# Altium PCB EvaluationV1.0.PcbDoc
Units mm, origin at the board's own origin, x right, y up, seen from the top; angles counter-clockwise.
Board outline 70 x 56 mm, 2 copper layers (Top Layer, Bottom Layer), stack 1.672 mm thick; 57 components, 53 nets, 270 pads, 78 vias.
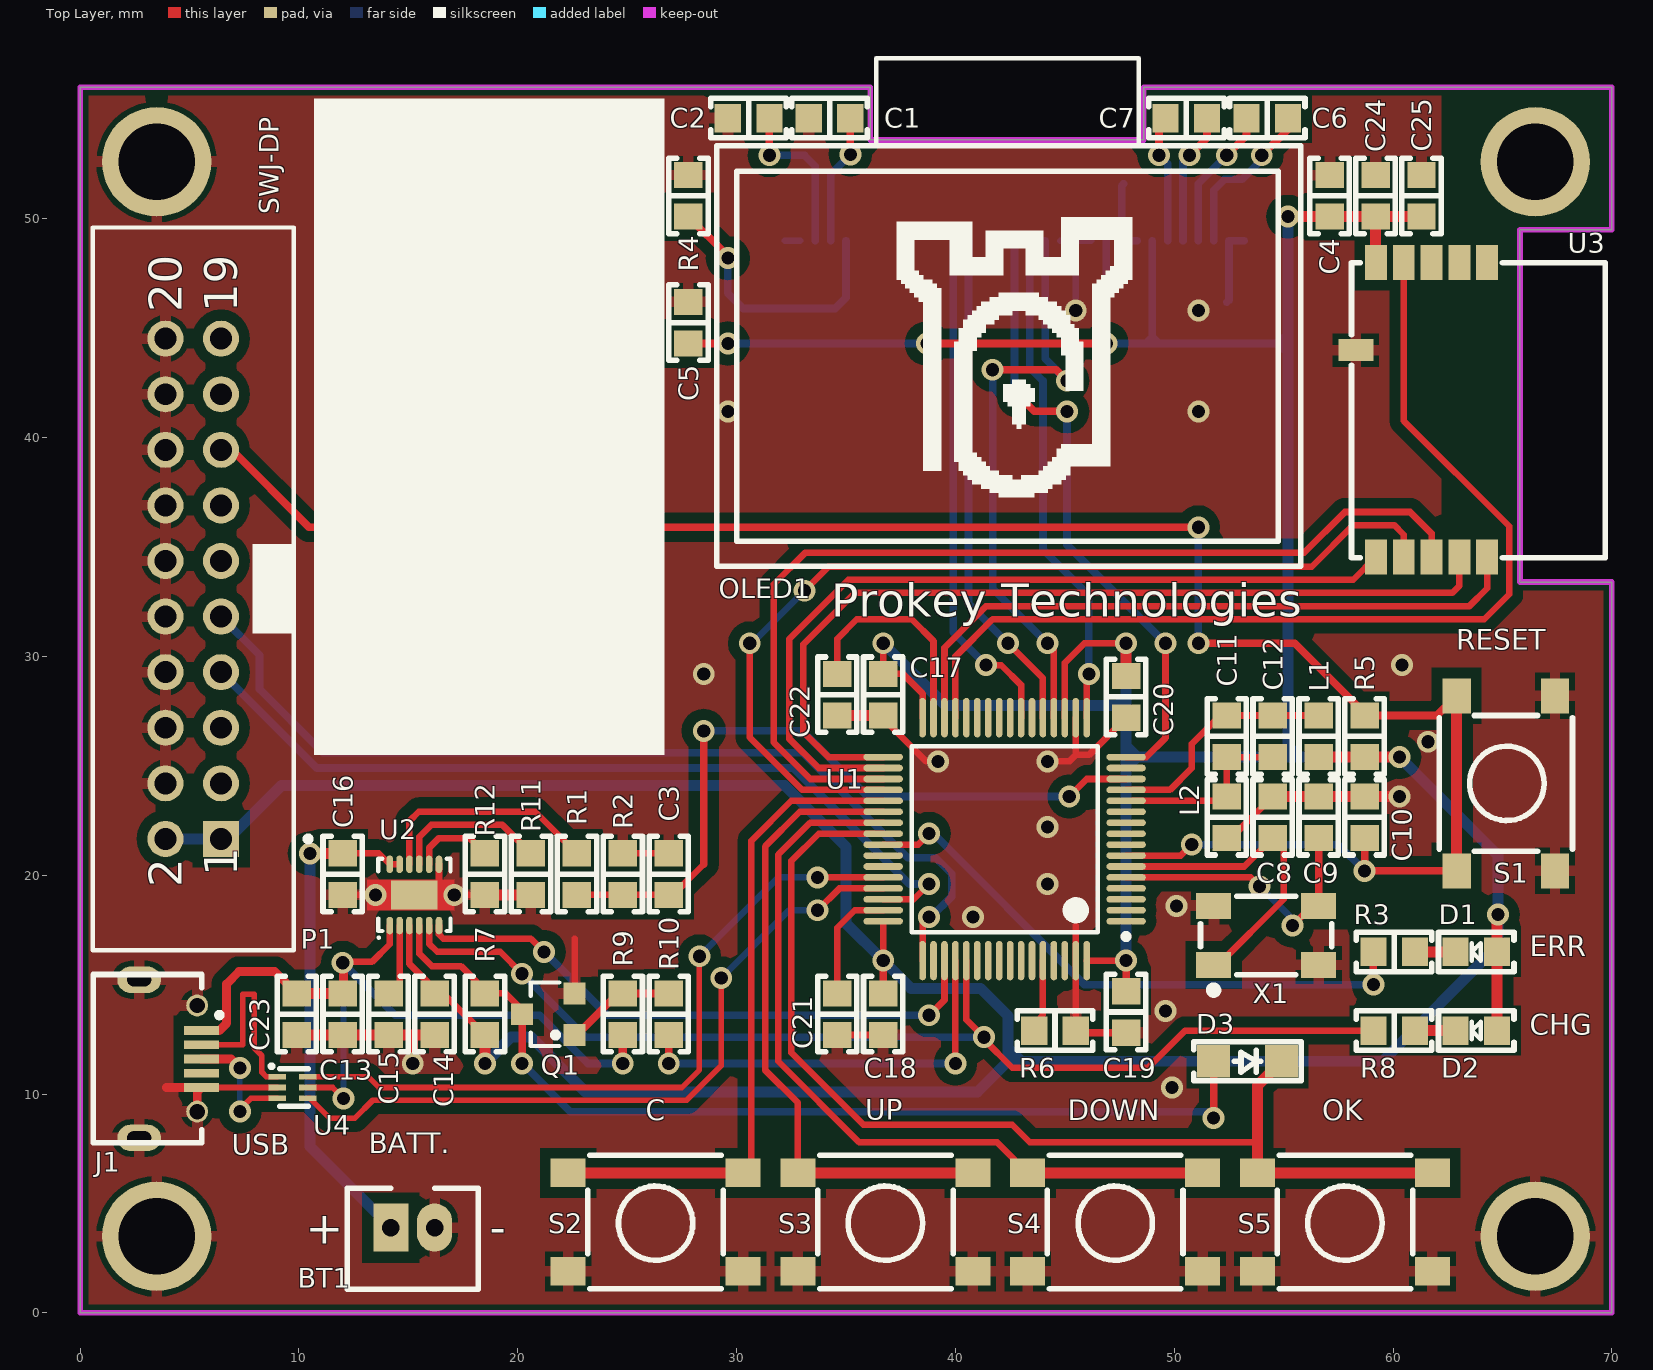
[diagram p0: Top Layer view]
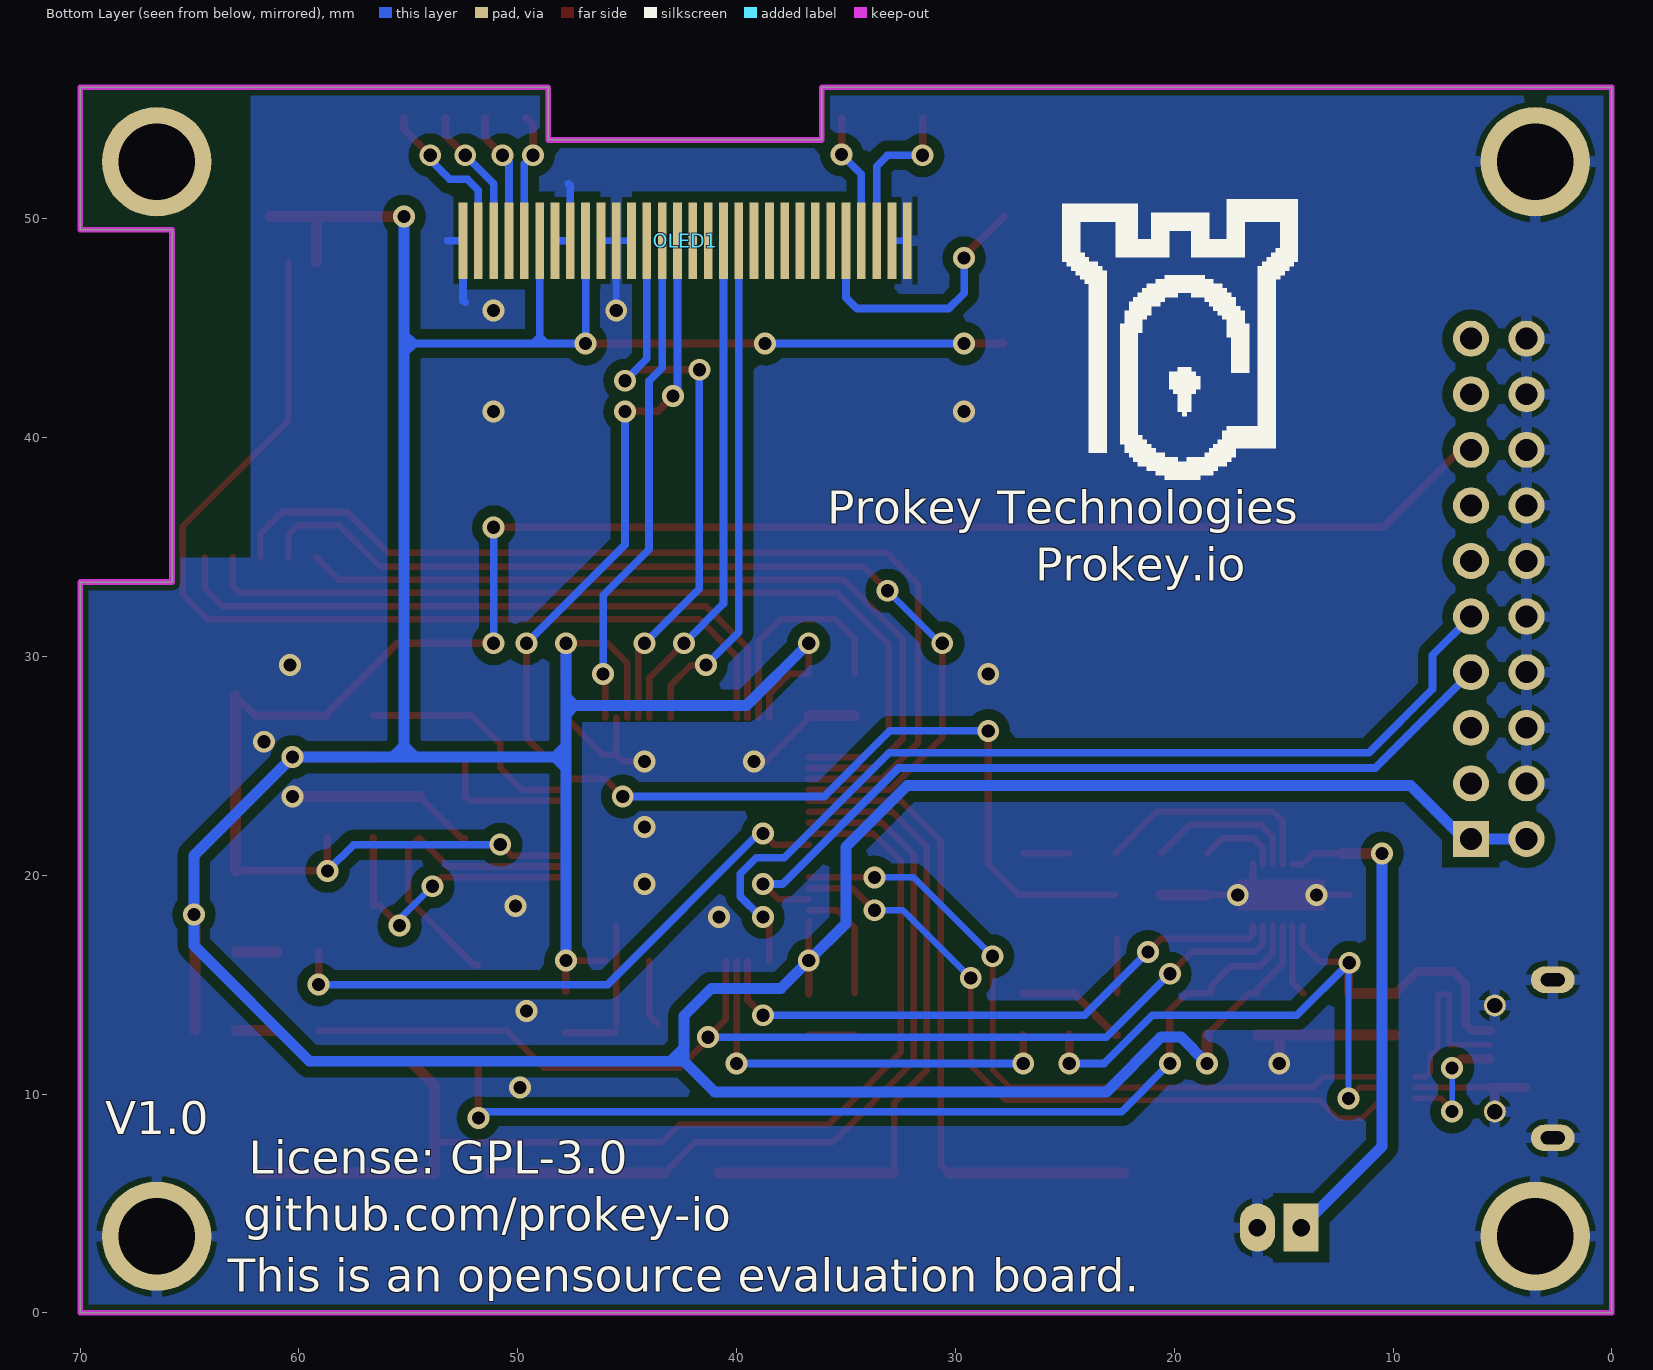
[diagram p1: Bottom Layer view, seen from below]
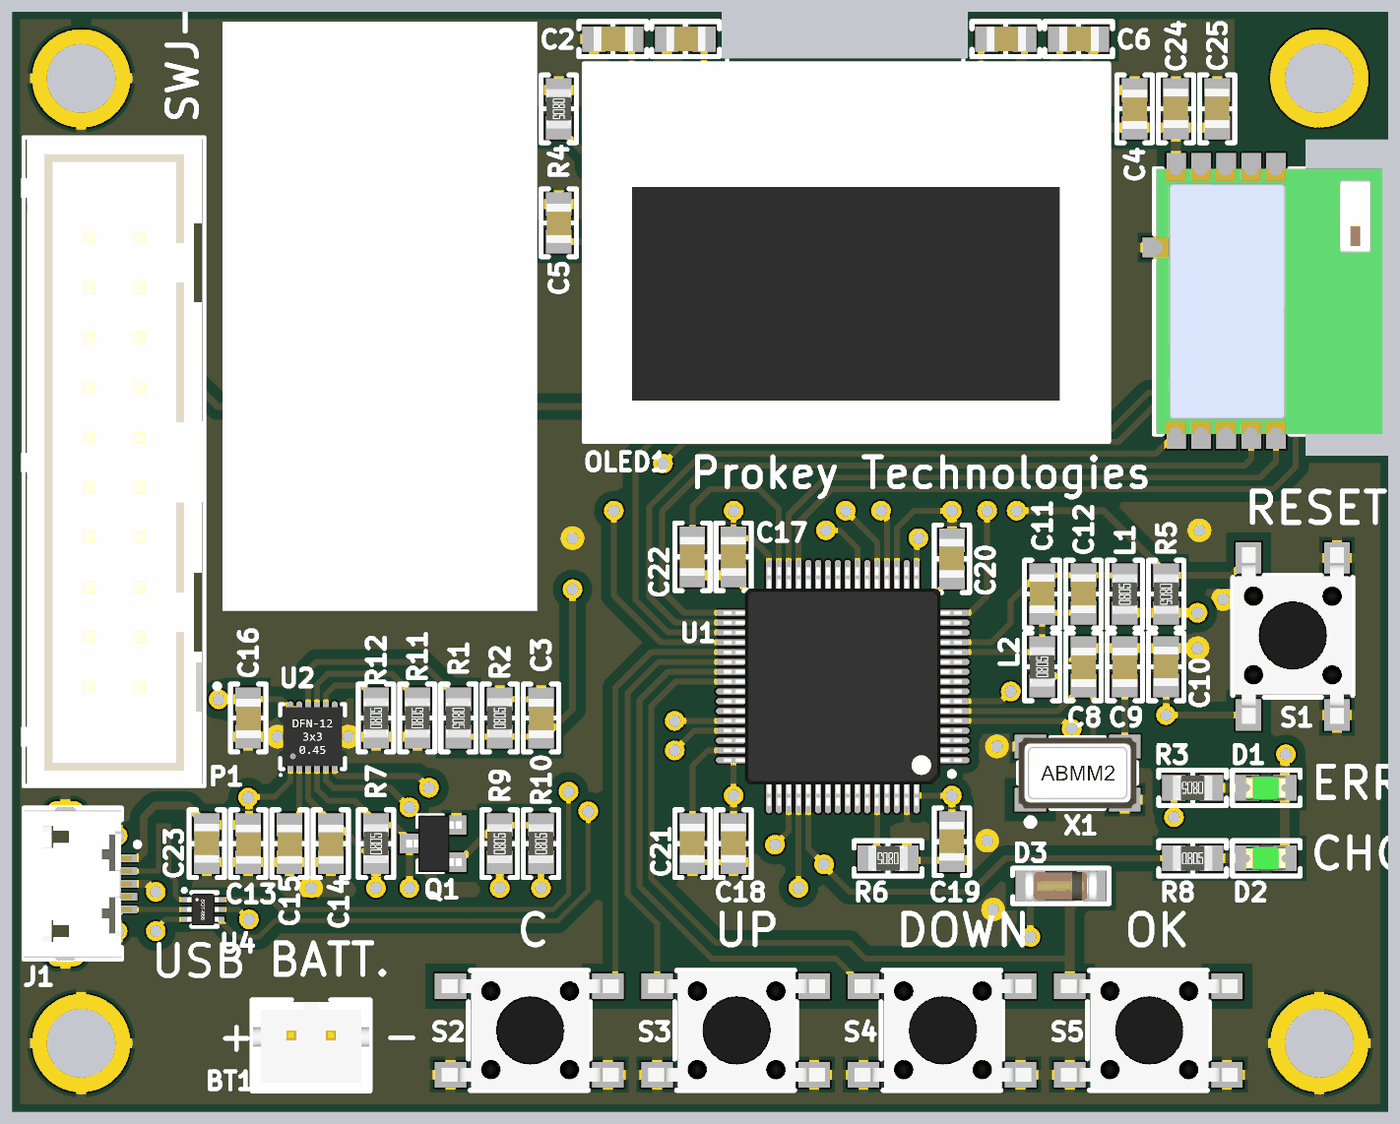
[diagram p2: 3D render of the assembled board from above, using the file's embedded part models]

## Layer stack, top to bottom
Top Solder: solder mask 0.0254, SM-003, Dk 4
Top Layer: signal copper 0.036
Dielectric 1: dielectric 1.6, FR-4, Dk 4.8
Bottom Layer: signal copper 0.036
Bottom Solder: solder mask 0.0254, SM-003, Dk 4

## Board outline
0,0 0,56 36.1,56 36.1,53.6 48.6,53.6 48.6,56 70,56 70,49.5 65.8,49.5 65.8,33.4 70,33.4 70,0

## Design rules (kind name [scope] priority, off if disabled: settings)
Clearance Clearance_1 [InPolygon vs IsKeepOut] p1: gap=0.254 ignorepadtopadclearanceinfootprint=FALSE
Clearance [All] p2: gap=0.254 ignorepadtopadclearanceinfootprint=FALSE except(0: Arc-Hole Track-Hole SMDPad-Hole THPad-Hole Via-Hole Fill-Hole Poly-Hole Region-Hole Text-Hole; 0.15: Track-Track Track-SMDPad SMDPad-SMDPad; 0.2: Arc-Arc Arc-Track Arc-SMDPad; 0.5: Arc-Poly Track-Poly SMDPad-Poly THPad-Poly Via-Poly Fill-Poly Poly-Poly)
HoleSize [All] p1: absolutevalues=TRUE maxlimit=5 minlimit=0.6 maxpercent=80.000 minpercent=20.000
MinimumSolderMaskSliver [All] p1: minsoldermaskwidth=0.2
PolygonConnect PolygonConnect_1 [IsVia] p1: connectstyle=Direct reliefconductorwidth=0.254 reliefentries=4 polygonreliefangle="90 Angle" airgapwidth=0.254
PolygonConnect [All] p2: connectstyle=Relief reliefconductorwidth=0.5 reliefentries=4 polygonreliefangle="90 Angle" airgapwidth=0.254
RoutingVias [All] p1: holewidth=0.6 width=1 viastyle="Through Hole" minholewidth=0.4 minwidth=0.8 maxholewidth=1.2 maxwidth=1.6
SolderMaskExpansion [All] p1: expansion=0.102 istentingtop=FALSE
Width [All] p1: maxlimit=10 minlimit=0.254 preferedwidth=0.254
28 further rules are at their usual default settings.

## Classes and differential pairs
component class EvaluationV1.0: BT1 C1 C2 C4 C6 C8 C9 C10 C12 C14 C16 C19 C21 C24 D1 D3 J1 L1 L2 OLED1 P1 Q1 R2 R4 R6 R7 R9 R10 S1 S2 S3 S5 U1 U2 U3 X1

## Components (designator, comment, footprint, x,y, rotation, side; value= is the part's Value field where it differs from the comment)
BT1 "BATT." "PH B2B" 14.2,3.9 r180 top
C1 "4u7" "CAP 0805" 34.25,54.6 r0 top
C2 "2u2" "CAP 0805" 30.55,54.6 r0 top
C3 "100nF" "CAP 0805" 26.9,20.05 r270 top
C4 "1uF" "CAP 0805" 57.1,51.05 r270 top
C5 "1uF" "CAP 0805" 27.8,45.25 r270 top
C6 "1uF" "CAP 0805" 54.25,54.6 r0 top
C7 "1uF" "CAP 0805" 50.55,54.6 r0 top
C8 "15pF" "CAP 0805" 54.5,22.65 r270 top
C9 "15pF" "CAP 0805" 56.6,22.65 r270 top
C10 "1uF" "CAP 0805" 58.7,22.65 r90 top
C11 "10nF" "CAP 0805" 52.4,26.35 r90 top
C12 "1uF" "CAP 0805" 54.5,26.35 r90 top
C13 "4u7" "CAP 0805" 12,13.65 r270 top
C14 "2u2" "CAP 0805" 16.2,13.65 r270 top
C15 "2u2" "CAP 0805" 14.1,13.65 r270 top
C16 "4u7" "CAP 0805" 12,20.05 r270 top
C17 "100nF" "CAP 0805" 36.7,28.25 r90 top
C18 "100nF" "CAP 0805" 36.7,13.65 r90 top
C19 "100nF" "CAP 0805" 47.8,13.75 r90 top
C20 "100nF" "CAP 0805" 47.8,28.15 r90 top
C21 "2u2" "CAP 0805" 34.6,13.65 r90 top
C22 "2u2" "CAP 0805" 34.6,28.25 r90 top
C23 "100nF" "CAP 0805" 9.9,13.65 r90 top
C24 "2u2" "CAP 0805" 59.2,51.05 r90 top
C25 "100nF" "CAP 0805" 61.3,51.05 r90 top
D1 "ERR" "LED 0805" 63.8,16.5 r180 top
D2 "CHG" "LED 0805" 63.8,12.9 r180 top
D3 "1N4148" "DIODE SOD-80" 51.8,11.5 r0 top
J1 "USB" USB_MICRO 5.55,12.9 r0 top
L1 "10uH" "RES 0805" 56.6,26.35 r90 top
L2 "10uH" "RES 0805" 52.4,22.65 r90 top
OLED1 "OLED_0.96Inch" "OLED 0.96\"" 52.5,49 r0 top locked
P1 "SWJ-DP" "BOX 2X10" 6.44,21.66 r90 top
Q1 "PT2222" SOT23 22.6,12.7 r90 top
R1 "4K7" "RES 0805" 22.7,20.05 r270 top
R2 "10K" "RES 0805" 24.8,20.05 r90 top
R3 "330R" "RES 0805" 60.05,16.5 r180 top
R4 "910K" "RES 0805" 27.8,51.05 r270 top
R5 "10K" "RES 0805" 58.7,26.35 r270 top
R6 "10K" "RES 0805" 44.55,12.9 r180 top
R7 "10K" "RES 0805" 18.5,13.65 r90 top
R8 "330R" "RES 0805" 60.05,12.9 r0 top
R9 "10K" "RES 0805" 24.8,13.65 r90 top
R10 "4K7" "RES 0805" 26.9,13.65 r90 top
R11 "4K7" "RES 0805" 20.6,20.05 r90 top
R12 "10K" "RES 0805" 18.5,20.05 r90 top
S1 "RESET" "SW SMD 6x6x5" 62.9,20.2 r90 top
S2 "C" "SW SMD 6x6x5" 22.3,6.4 r0 top
S3 "UP" "SW SMD 6x6x5" 32.8,6.4 r0 top
S4 "DOWN" "SW SMD 6x6x5" 43.3,6.4 r0 top
S5 "OK" "SW SMD 6x6x5" 53.8,6.4 r0 top
U1 "STM32F205RET6" LQFP64_N 42.25,21.65 r90 top
U2 "STNS01" DFN12-3x3 14.15,17.7 r90 top
U3 "SPBTLE-RF" SPBTLE-RF 64.3,48 r270 top
U4 "USBLC6" SOT-666 9,10.8 r0 top
X1 "8MHz" ABMM2 51.8,15.9 r0 top

## Footprints (in the part's own frame and the unit in brackets; to place one, negate y for a bottom-side part, rotate by r counter-clockwise, add the part's x,y. Pads: shape width x height; smd on the part's side, far side on the other; paste and mask are expansions set on the pad)
ABMM2 [mm]
  rect 1.6x1.2 smd paste+0 mask+0.102: 1(0,0) 2(4.8,0) 3(4.8,2.7) 4(0,2.7)
  silkscreen extent -0.6,-1.25 5.4,3.15, body extent -0.6,-0.45 5.4,3.15, height 1.21
"BOX 2X10" [mm]
  rect 1.65x1.65 hole 1: 1(0,0)
  round 1.65 hole 1: 2(0,2.54) 3(2.54,0) 4(2.54,2.54) 5(5.08,0) 6(5.08,2.54) 7(7.62,0) 8(7.62,2.54) 9(10.16,0) 10(10.16,2.54) 11(12.7,0) 12(12.7,2.54) 13(15.24,0) 14(15.24,2.54) 15(17.78,0) 16(17.78,2.54) 17(20.32,0) 18(20.32,2.54) 19(22.86,0) 20(22.86,2.54)
  silkscreen extent -5.08,-4.11 27.94,5.87, body extent -5.11,-3.2 27.91,6, height 9.46
"CAP 0805" [mm]
  rect 1.2x1.3 smd: 1(-0.95,0) 2(0.95,0)
  silkscreen extent -1.72,-0.9 1.73,0.9, body extent -0.97,-0.63 1.02,0.65, height 1.26
DFN12-3x3 [mm]
  oval 0.8x0.3 smd: 1(0,0) 2(0,-0.45) 3(0,-0.9) 4(0,-1.35) 5(0,-1.8) 6(0,-2.25) 7(2.8,-2.25) 8(2.8,-1.8) 9(2.8,-1.35) 10(2.8,-0.9) 11(2.8,-0.45) 12(2.8,0)
  rect 1.31x2.12 smd paste-0.82: 13(1.4,-1.125)
  silkscreen extent -0.6,-2.78 3.05,0.55, body extent -0.1,-2.63 2.9,0.38, height 0.76
"DIODE SOD-80" [mm]
  rect 1.5x1.5 smd: 1(0,0) 2(3.1,0)
  silkscreen extent -0.9,-0.9 4,0.9, body extent -0.29,-0.81 3.41,0.79, height 1.6
"LED 0805" [mm]
  rect 1.2x1.3 smd: 1(-0.95,0) 2(0.95,0)
  silkscreen extent -1.72,-0.9 1.73,0.9, body extent -0.99,-0.62 1.03,0.62, height 1.1
LQFP64_N [mm]
  oval 0.3x1.8 smd: 1(-3.75,-5.55) 2(-3.25,-5.55) 3(-2.75,-5.55) 4(-2.25,-5.55) 5(-1.75,-5.55) 6(-1.25,-5.55) 7(-0.75,-5.55) 8(-0.25,-5.55) 9(0.25,-5.55) 10(0.75,-5.55) 11(1.25,-5.55) 12(1.75,-5.55) 13(2.25,-5.55) 14(2.75,-5.55) 15(3.25,-5.55) 16(3.75,-5.55) 33(3.75,5.55) 34(3.25,5.55) 35(2.75,5.55) 36(2.25,5.55) 37(1.75,5.55) 38(1.25,5.55) 39(0.75,5.55) 40(0.25,5.55) 41(-0.25,5.55) 42(-0.75,5.55) 43(-1.25,5.55) 44(-1.75,5.55) 45(-2.25,5.55) 46(-2.75,5.55) 47(-3.25,5.55) 48(-3.75,5.55)
  oval 1.8x0.3 smd: 17(5.55,-3.75) 18(5.55,-3.25) 19(5.55,-2.75) 20(5.55,-2.25) 21(5.55,-1.75) 22(5.55,-1.25) 23(5.55,-0.75) 24(5.55,-0.25) 25(5.55,0.25) 26(5.55,0.75) 27(5.55,1.25) 28(5.55,1.75) 29(5.55,2.25) 30(5.55,2.75) 31(5.55,3.25) 32(5.55,3.75) 49(-5.55,3.75) 50(-5.55,3.25) 51(-5.55,2.75) 52(-5.55,2.25) 53(-5.55,1.75) 54(-5.55,1.25) 55(-5.55,0.75) 56(-5.55,0.25) 57(-5.55,-0.25) 58(-5.55,-0.75) 59(-5.55,-1.25) 60(-5.55,-1.75) 61(-5.55,-2.25) 62(-5.55,-2.75) 63(-5.55,-3.25) 64(-5.55,-3.75)
  silkscreen extent -4.57,-5.68 4.25,4.25, body extent -6.07,-6.07 6.07,6.07, height 1.62
"OLED 0.96\"" [mm]
  rect 0.4x3.5 smd far side paste+0 mask+0.02: 1(0,0) 2(-0.7,0) 3(-1.4,0) 4(-2.1,0) 5(-2.8,0) 6(-3.5,0) 7(-4.2,0) 8(-4.9,0) 9(-5.6,0) 10(-6.3,0) 11(-7,0) 12(-7.7,0) 13(-8.4,0) 14(-9.1,0) 15(-9.8,0) 16(-10.5,0) 17(-11.2,0) 18(-11.9,0) 19(-12.6,0) 20(-13.3,0) 21(-14,0) 22(-14.7,0) 23(-15.4,0) 24(-16.1,0) 25(-16.8,0) 26(-17.5,0) 27(-18.2,0) 28(-18.9,0) 29(-19.6,0) 30(-20.3,0)
  silkscreen extent -23.4,-14.87 3.27,8.34, body extent -23.43,-14.89 3.27,4.37, height 1.6
"PH B2B" [mm]
  rect 1.6x2.2 hole 0.8: 1(0,0)
  oval 1.6x2.2 hole 0.8: 2(-2,0)
  silkscreen extent -4,-1.8 2,2.83, body extent -3.95,-1.7 1.95,2.8, height 6
"RES 0805" [mm]
  rect 1.2x1.3 smd: 1(-0.95,0) 2(0.95,0)
  silkscreen extent -1.72,-0.9 1.73,0.9, body extent -1,-0.62 1,0.63, height 0.6
SOT23 [mm]
  rect 1x1 smd: 1(0,0) 2(0.95,2.4) 3(1.9,0)
  silkscreen extent -0.5,0.7 2.4,2, body extent -0.5,-0.26 2.4,2.56, height 1.5
SOT-666 [mm]
  rect 0.8x0.254 smd: 1(0,0) 2(0,-0.5) 3(0,-1) 4(1.4,-1) 5(1.4,-0.5) 6(1.4,0)
  silkscreen extent -0.3,-1.35 1.43,0.53, body extent -0.1,-1.3 1.5,0.3, height 0.6
SPBTLE-RF [mm]
  rect 1.6x1 smd: 1(0,0) 2(0,-1.27) 3(0,-2.54) 4(0,-3.81) 5(0,-5.08) 7(13.462,-5.08) 8(13.462,-3.81) 9(13.462,-2.54) 10(13.462,-1.27) 11(13.462,0)
  rect 1x1.6 smd: 6(4,-6)
  silkscreen extent 0,-6.2 13.5,5.4, body extent 0,-6.1 13.5,5.4, height 2
"SW SMD 6x6x5" [mm]
  rect 1.6x1.3 smd: 1(0,0) 1(8,0) 2(0,-4.5) 2(8,-4.5)
  silkscreen extent 0.9,-5.3 7.1,0.8, body extent -0.45,-5.25 8.55,0.75, height 5
USB_MICRO [mm]
  rect 1.6x0.4 smd paste+0 mask+0.076: 1(0,0) 2(0,-0.65) 3(0,-1.3) 4(0,-1.95) 5(0,-2.6)
  oval 2x1.2 hole 0.6 slot 1.1 at 0 deg: 6(-2.85,-4.9) 6(-2.85,2.325)
  round 1 hole 0.7: 6(-0.2,-3.7) 6(-0.2,1.15)
  silkscreen extent -4.95,-5.13 0.93,2.57, body extent -4.97,-5.05 0.52,2.45, height 2.62

## Part data
BT1: library part Battery, "Multicell Battery", LatestRevisionDate=17-Jul-2002, LatestRevisionNote="Re-released for DXP Platform.", PackageDescription="Battery; 2 Leads", PackageReference=BAT-2, Published=24-Mar-1999, Publisher="Altium Limited"
C1 C2 C3 C4 C5 C6 C7 C8 C9 C10 C11 C12 C13 C14 C15 C16 C17 C18 C19 C20 C21 C22 C23 C24 C25: library part CAP, "Multi Layer Capacitor"
D1 D2: library part LED2, "Typical RED, GREEN, YELLOW, AMBER GaAs LED", LatestRevisionDate=17-Jul-2002, LatestRevisionNote="Re-released for DXP Platform.", PackageDescription="SM LED; 2 Flat Leads", PackageReference=3.2X1.6X1.1, PackageVersion=Feb-2002, Published=8-Jun-2000, Publisher="Altium Limited"
D3: library part DIODE, "Diode"
J1: library part "USB MICRO", "Micro USB Connector"
L1 L2: library part INDUCTOR, "INDUCTOR"
OLED1: library part OLED_0.96
P1: library part "Header 10X2", "Header, 10-Pin, Dual row", LatestRevisionDate=17-Jul-2002, LatestRevisionNote="Re-released for DXP Platform.", Publisher="Altium Limited"
Q1: library part NPN, "NPN Transistor"
R1 R2 R3 R4 R5 R6 R7 R8 R9 R10 R11 R12: library part RES, "Resistor"
S1 S2 S3 S4 S5: library part SW-PB, "Switch", LatestRevisionDate=17-Jul-2002, LatestRevisionNote="Re-released for DXP Platform.", PackageDescription="Switch; 2 Leads", PackageReference=SPST-2, Published=24-Mar-1999, Publisher="Altium Limited"
U1: "ARM Cortex-M3 32-bit MCU, 512 KB Flash, 128 KB Internal RAM, 51 I/Os, 64-pin LQFP, -40 to 85 degC, Tray", I/Os (High Current)=51, Operating Frequency(F) (Processor speed) (MHz)=120, Supplier Part Number 1=497-11155-ND, Supply Voltage(Vcc) min (V)=1.8, ComponentLink1Description="Manufacturer URL", ComponentLink1URL=http://www.st.com/web/en/home.html, ComponentLink2Description=Datasheet, ComponentLink2URL=http://www.st.com/st-web-ui/static/active/en/resource/technical/document/datasheet/CD00237391.pdf, ComponentLink3Description="Package Specification", ComponentLink3URL=http://www.st.com/st-web-ui/static/active/en/resource/technical/document/datasheet/DM00037051.pdf, Core="ARM Cortex-M3", D/A Converter="2x12-bit (2 Channel)", DatasheetVersion="Rev. 9", FLASH Size (Prog) (kB)=512, Internal RAM Size (kB)=128, Mounting Technology="Surface Mount", PackageDescription="64-Pin Low Profile Quad Flat Package, 10 x 10 mm Body, 0.5 mm Pitch", PackageReference=LQFP64, PackageVersion="Rev. 4, 06/2013", Packing=Tray, PartNumber=STM32F205RET6, Supplier 1=Digi-Key, Supplier 2=Farnell, Supplier 3=Newark, Supplier 4=Mouser, Supplier Part Number 2=2060897, Supplier Part Number 3=47T9329, Supplier Part Number 4=511-STM32F205RET6
U2: "Li-Ion linear battery charger with LDO"
U3: "Very low power network processor module for Bluetooth® low / energy v4.1"
U4: "ESD Protection for USB 2.0"
X1: library part XTAL2

## Free pads (board coordinates)
  round 5 hole 3.5: 1(66.5,3.5) 2(66.5,52.6) 3(3.5,52.6) 4(3.5,3.5)

## Via types
v1: diameter 1, hole 0.6, Top Layer to Bottom Layer, 78 vias

## Nets (pads, with @x,y where several pads share a name; then routed paths per layer and width w, separated by ;. In a path a pad name is that pad's centre, name@x,y a point inside that pad or via, vN(x,y) a via of type N, cw(c..) or ccw(c..) an arc to the next point about the centre after c; other vN are vias at no path point)
3V1: C4.2 C5.2 C14.1 C17.2 C18.2 C19.2 C20.2 C24.1 C25.1 D1.1 D2.1 L1.1 OLED1.6 OLED1.9 P1.1 P1.2 R5.2 R7.1 U1.19 U1.32 U1.48 U1.64 U2.3 U3.5 | length 258.6
  Top Layer w0.3: U2.3 15.05,15.95 16.2,14.8 C14.1 16.6,14.6 R7.1 ; v1(36.7,16.1) U1.48 ; v1@36.7,30.4 C17.2 37.6,29.2 38.5,28.3 U1.32 ; U1.19 45,29.7 45.9,30.6 v1(47.8,30.6) ; U1.64 v1(47.8,16.1)
  Top Layer w0.35: C5.2 v1(29.6,44.3) ; C18.2 v1(36.7,16.1) ; v1(38.7,44.3) v1(46.9,44.3) ; C19.2 v1(47.8,16.1)
  Top Layer w0.5: v1(18.5,11.4) R7.1 ; C20.2 v1(47.8,30.6) ; v1(55.2,50.1) C4.2 C24.1 ; L1.1 R5.2 v1(60.3,25.4) ; U3.5 59.2,48.02 C24.1 ; C25.1 C24.1 ; D2.1 D1.1 64.75,18.15 v1(64.8,18.2)
  Bottom Layer w0.35: v1(29.6,44.3) v1(38.7,44.3) ; OLED1.9 v1(46.9,44.3) 48.7,44.3 ; OLED1.6 49,44.6 ; 55.2,43.8 54.7,44.3 ; 55.2,44.9 55.2,44.8 54.7,44.3 ; 48.7,44.3 49.3,44.3 ; 48.7,44.3 49,44.6 ; 49,44.6 49.3,44.3 ; 49.3,44.3 54.7,44.3
  Bottom Layer w0.5: P1.2 P1.1 6.76,21.66 9.2,24.1 32.2,24.1 35,21.3 35,17.8 v1(36.7,16.1) 37.965,14.835 41.143,14.835 42.4,13.578 42.4,12.113 ; v1(18.5,11.4) 19.7,12.6 20.6,12.6 23.1,10.1 41,10.1 42.4,11.5 ; v1(36.7,30.6) 39.55,27.75 47.404,27.75 ; v1(47.8,16.1) 47.8,24.9 ; v1(47.8,30.6) 47.8,28.146 ; v1(55.2,50.1) 55.2,44.8 55.2,43.8 55.2,25.9 ; 42.4,11.5 43.013,11.5 ; 42.4,11.5 42.4,12.113 ; 42.4,12.113 43.013,11.5 ; 43.013,11.5 59.513,11.5 64.8,16.787 v1(64.8,18.2) 64.8,20.9 v1(60.3,25.4) 55.7,25.4 ; 47.404,27.75 47.8,27.354 ; 47.404,27.75 47.8,27.75 ; 47.404,27.75 47.8,28.146 ; 47.8,24.9 47.8,25.9 ; 47.8,24.9 48.3,25.4 ; 47.8,25.9 47.8,27.354 ; 47.8,25.9 48.3,25.4 ; 47.8,27.354 47.8,27.75 ; 47.8,27.75 47.8,28.146 ; 48.3,25.4 54.7,25.4 ; 54.7,25.4 55.7,25.4 ; 54.7,25.4 55.2,25.9 ; 55.2,25.9 55.7,25.4
BATT_VOLTAGE: R1.1 U2.10 | length 10.6
  Top Layer w0.3: U2.10 15.05,22.475 15.475,22.9 20.8,22.9 R1.1
GND: BT1.2 C1.1 C2.1 C3.1 C4.1 C5.1 C8.1 C9.1 C10.2 C13.2 C14.2 C15.2 C16.2 C17.1 C18.1 C19.1 C20.1 C21.1 C22.1 C23.1 C24.2 C25.2 J1.5 J1.6 L2.1 OLED1.1 OLED1.7 OLED1.8 OLED1.10 OLED1.11 OLED1.12 OLED1.29 OLED1.30 P1.4 P1.6 P1.8 P1.10 P1.12 P1.14 P1.16 P1.18 P1.20 pad.1 pad.3 pad.4 Q1.3 R2.2 R4.1 R6.1 R11.1 R12.1 S1.2 S2.2 S3.2 S4.2 S5.2 U1.18 U1.63 U2.7 U2.13 U3.6 U4.2 X1.2 X1.4 | length 69.4
  Top Layer w0.254: J1.5 U4.2
  Top Layer w0.3: C16.2 v1(13.5,19.1) U2.13 15.6,19.1 v1(17.1,19.1) R12.1 ; 16.4,19.682 16.4,20.125 U2.7 ; Q1.3 22.6,17.1 ; R2.2 C3.1 ; C21.1 C18.1 ; C17.1 36.7,27.169 38.669,25.2 v1(39.2,25.2) ; v1(44.2,25.2) 45.2,25.2 45.5,25.5 ; R6.1 R6.1@45.6,12.8 ; R6.1@45.5,13.2 U1.63 45.5,17.701 ; U1.18 45.5,25.5 ; C20.1 46.1,25.5 45.5,25.5 ; L2.1 52.6,21.7 C8.1
  Top Layer w0.35: R6.1@45.6,12.8 C19.1
  Top Layer w0.4: 3.932,10.3 J1.5 5.35,10.1 J1.6@5.35,9.2
  Top Layer w0.5: C23.1 15.275,12.7 ; v1(15.2,11.4) 15.2,12.625 15.275,12.7 ; C14.2 15.275,12.7 ; R12.1 R11.1 ; C22.1 C17.1 ; C8.1 C9.1 C10.2 v1(60.3,23.6)
  Bottom Layer w0.3: OLED1.30 OLED1.29 ; OLED1.12 OLED1.11 ; v1(45.5,45.8) OLED1.11 ; OLED1.10 OLED1.11
  Bottom Layer w0.35: 47.685,51.6 47.6,51.515 OLED1.8 OLED1.7 ; 52.4,46.18 52.5,46.28 OLED1.1 53.185,49
  other v1: 49.9,10.3 49.6,13.8 40.8,18.1 50.1,18.6 44.2,19.6 44.2,22.2 61.6,26.1 28.5,29.2 60.4,29.6 29.6,41.2 51.1,41.2 51.1,45.8
NetBT1_1: BT1.1 C16.1 U2.11 U2.12 | length 22.9
  Top Layer w0.3: C16.1@12.3,21 13.65,21 U2.12 U2.11
  Top Layer w0.5: v1(10.5,21) C16.1 C16.1@12.3,21
  Bottom Layer w0.5: v1(10.5,21) 10.5,7.6 BT1.1
NetC1_2: C1.2 OLED1.27 | length 6
  Top Layer w0.35: v1(35.2,52.929) C1.2
  Bottom Layer w0.35: OLED1.27 34.3,52.029 v1(35.2,52.929)
NetC2_2: C2.2 OLED1.28 | length 7.4
  Top Layer w0.35: v1(31.5,52.9) C2.2
  Bottom Layer w0.35: v1(31.5,52.9) 33.1,52.9 33.6,52.4 OLED1.28
NetC6_1: C6.1 OLED1.3 | length 6.5
  Top Layer w0.35: v1(52.4,52.9) 53.3,53.8 C6.1
  Bottom Layer w0.35: OLED1.3 51.1,51.6 v1(52.4,52.9)
NetC6_2: C6.2 OLED1.2 | length 7.5
  Top Layer w0.35: v1(54,52.9) 55.2,54.1 C6.2
  Bottom Layer w0.35: OLED1.2 51.8,51.3 52.3,51.8 53.1,51.8 54,52.7 v1(54,52.9)
NetC7_1: C7.1 OLED1.5 | length 6
  Top Layer w0.35: v1(49.3,52.9) 49.3,54.3 C7.1
  Bottom Layer w0.35: v1@49.2,52.9 v1@49.25,52.85 ; v1(49.3,52.9) 49.7,52.5 OLED1.5
NetC7_2: C7.2 OLED1.4 | length 6.2
  Top Layer w0.35: v1(50.7,52.9) 51.5,53.7 C7.2
  Bottom Layer w0.35: OLED1.4 50.4,52.6 v1(50.7,52.9) ; v1@50.8,52.8 v1@50.9,52.9
NetC8_2: C8.2 U1.6 X1.1 | length 14.7
  Top Layer w0.3: U1.6 53.2,20.4 C8.2 55,21.2 55,18.9 52,15.9 X1.1
NetC9_2: C9.2 U1.5 X1.3 | length 13.4
  Top Layer w0.3: U1.5 53.5,19.9 v1(53.9,19.5) ; v1(55.4,17.7) 56.3,18.6 X1.3
  Top Layer w0.35: X1.3 C9.2
  Bottom Layer w0.3: v1(53.9,19.5) 55.4,18 v1(55.4,17.7)
NetC21_2: C21.2 U1.47 | length 5.4
  Top Layer w0.3: C21.2 34.6,17.6 35.4,18.4 U1.47
NetC22_2: C22.2 U1.31 | length 10.3
  Top Layer w0.3: C22.2 34.6,30.8 35.495,31.695 38.005,31.695 39,30.7 U1.31
NetD1_2: D1.2 R3.1 | length 1.8
  Top Layer w0.5: R3.1 D1.2
NetD2_2: D2.2 R8.2 | length 1.8
  Top Layer w0.5: R8.2 D2.2
NetOLED1_26: OLED1.26 R4.2 | length 12.7
  Top Layer w0.35: R4.2 29.6,48.3 v1(29.6,48.2)
  Bottom Layer w0.35: v1(29.6,48.2) 29.6,46.6 30.3,45.9 34.5,45.9 35,46.4 OLED1.26
NetQ1_1: Q1.1 R9.2 R10.2 | length 5.4
  Top Layer w0.35: Q1.1 22.692,12.7 24.592,14.6 R9.2 ; R9.2@24.5,14.6 R10.2
NetR11_2: R11.2 U2.9 | length 7.1
  Top Layer w0.3: U2.9 15.5,21.75 16.05,22.3 19.3,22.3 R11.2
NetR12_2: R12.2 U2.8 | length 3.8
  Top Layer w0.3: U2.8 15.95,21.25 16.4,21.7 17.8,21.7 R12.2
SHUTDOWN: D3.1 Q1.2 R7.2 U2.4 | length 44.7
  Top Layer w0.3: U2.4 15.5,16.423 16.073,15.85 17.4,15.85 18.3,14.95 R7.2@18.3,14.6 ; R7.2 19.45,14.6 Q1.2@20.3,13.75
  Top Layer w0.35: v1(20.2,11.4) Q1.2 ; v1(51.8,8.9) D3.1
  Bottom Layer w0.35: v1(20.2,11.4) 22.4,9.2 51.3,9.2 51.5,9.2 v1(51.8,8.9)
uC_ADC_VBAT: C3.2 R1.2 R2.1 U1.14 | length 33.4
  Top Layer w0.3: R1.2 R2.1 C3.2 27.1,19.1 28.5,20.5 ; v1(45.2,23.6) 46,24.4 U1.14
  Top Layer w0.35: 28.5,20.5 v1(28.5,26.6)
  Bottom Layer w0.35: v1(28.5,26.6) 33,26.6 36,23.6 v1(45.2,23.6)
uC_BOOT0: R6.2 U1.60 | length 3.1
  Top Layer w0.3: R6.2@43.6,13.2 44,13.6 U1.60
uC_BT_IRQ: U1.29 U3.4 | length 46.4
  Top Layer w0.3: U1.29 40,30 41.7,31.7 64.167,31.7 65.304,32.837 65.304,35.946 60.49,40.76 U3.4
uC_BT_RST: U1.30 U3.11 | length 30.5
  Top Layer w0.3: U1.30 39.5,30.4 41.383,32.283 63.468,32.283 64.3,33.115 U3.11
uC_GPIO_CEN: U1.51 U2.6 | length 27.1
  Top Layer w0.3: U2.6 16.4,17.3 16.6,17.1 20.6,17.1 v1(21.2,16.5) ; v1(38.8,13.6) 39.5,14.3 U1.51
  Bottom Layer w0.35: v1(21.2,16.5) 24.1,13.6 v1(38.8,13.6)
uC_GPIO_CHG: R8.1 U1.53 U2.5 | length 50.9
  Top Layer w0.3: U2.5 15.95,16.873 16.323,16.5 19.2,16.5 v1(20.2,15.5) ; U1.53 40.5,13.4 v1(41.3,12.6) 41.3,12.5 42.6,11.2 48.8,11.2 50.5,12.9 R8.1
  Bottom Layer w0.35: v1(20.2,15.5) 23.1,12.6 v1(41.3,12.6)
uC_KEY_C: S2.1 U1.37 | length 30.1
  Top Layer w0.3: S2.1@30.3,6.4 30.676,6.776 30.676,21.576 32.5,23.4 U1.37
  Top Layer w0.5: S2.1@22.3,6.4 S2.1@30.3,6.4
uC_KEY_DOWN: S4.1 U1.39 | length 36.4
  Top Layer w0.3: U1.39 33.358,22.4 31.9,20.942 31.9,11.5 35.6,7.8 41.9,7.8 S4.1@43.3,6.4
  Top Layer w0.5: S4.1@43.3,6.4 S4.1@51.3,6.4
uC_KEY_OK: D3.2 S5.1 U1.40 | length 50
  Top Layer w0.3: U1.40 33.75,21.9 32.5,20.65 32.5,11.9 35.8,8.6 42.6,8.6 43.4,7.8 53.8,7.8
  Top Layer w0.5: D3.2 53.8,10.4 53.8,9 53.8,8.2 53.8,7.8 53.8,6.4 S5.1@61.8,6.4
uC_KEY_UP: S3.1 U1.38 | length 29.6
  Top Layer w0.3: S3.1@32.8,6.4 32.8,9.6 31.3,11.1 31.3,21.312 32.888,22.9 U1.38
  Top Layer w0.5: S3.1@32.8,6.4 S3.1@40.8,6.4
uC_LCD_CS: OLED1.13 U1.20 | length 27.8
  Top Layer w0.3: v1(44.2,30.6) 44.5,30.3 U1.20
  Top Layer w0.35: v1(41.7,43.1) 44.6,43.1 v1(45.1,42.6)
  Bottom Layer w0.35: v1@41.7,43.4 v1(41.7,43.1) 41.7,33.1 v1(44.2,30.6) ; OLED1.13 44.1,43.6 v1(45.1,42.6)
uC_LCD_D0: OLED1.18 U1.21 | length 23.2
  Top Layer w0.3: v1(42.4,30.6) 44,29 U1.21
  Bottom Layer w0.35: OLED1.18 40.6,32.4 v1(42.4,30.6)
uC_LCD_D1: OLED1.19 U1.23 | length 23.5
  Top Layer w0.3: v1(41.4,29.6) 42.096,29.6 43,28.696 U1.23
  Bottom Layer w0.35: OLED1.19 39.9,31.1 v1(41.4,29.6)
uC_LCD_DC: OLED1.15 U1.16 | length 28.9
  Top Layer w0.3: U1.16 48.722,25.4 49.6,26.278 v1(49.6,30.6)
  Top Layer w0.35: v1(42.9,41.9) 43.6,41.2 v1(45.1,41.2)
  Bottom Layer w0.35: OLED1.15 42.7,42.1 v1(42.9,41.9) ; v1@45.1,41.5 v1(45.1,41.2) 45.1,35.1 v1(49.6,30.6)
uC_LCD_RES: OLED1.14 U1.17 | length 23
  Top Layer w0.3: U1.17 46,29.1 v1(46.1,29.2)
  Bottom Layer w0.35: OLED1.14 43.4,43.2 44,42.6 44,34.9 46.1,32.8 v1(46.1,29.2)
uC_LED_ERR: R3.2 U1.41 | length 27
  Top Layer w0.3: U1.41 38.1,21.4 38.3,21.4 v1(38.8,21.9)
  Top Layer w0.35: v1(59.1,15) R3.2
  Bottom Layer w0.35: v1@38.8,22.1 45.9,15 v1(59.1,15)
uC_NRST: C10.1 P1.15 R5.1 S1.1 U1.7 | length 90.4
  Top Layer w0.3: U1.7 50.3,20.9 v1(50.8,21.4)
  Top Layer w0.35: P1.15 6.922,39.44 10.462,35.9 v1(51.1,35.9) ; v1(51.1,30.6) 55.504,30.6 58.7,27.404 R5.1 62,27.3 S1.1@62.9,28.2 ; C10.1 v1(58.7,20.2) S1.1@62.9,20.2
  Top Layer w0.5: S1.1@62.9,20.2 S1.1@62.9,28.2
  Bottom Layer w0.3: v1@58.65,20.15 v1@58.7,20.1
  Bottom Layer w0.35: v1(50.8,21.4) 57.5,21.4 v1(58.7,20.2) ; v1(51.1,30.6) v1(51.1,35.9)
uC_POWER_SET: R10.1 U1.52 | length 19.1
  Top Layer w0.3: v1(40,11.4) 40,13.65 U1.52
  Top Layer w0.35: v1(26.9,11.4) R10.1
  Bottom Layer w0.35: v1(26.9,11.4) v1(40,11.4)
uC_SPI2_MISO: U1.35 U3.9 | length 45.8
  Top Layer w0.3: U1.35 33.371,24.4 31.7,26.071 31.7,33.3 33.144,34.744 55.944,34.744 57.8,36.6 60.779,36.6 61.76,35.619 U3.9
uC_SPI2_MOSI: U1.36 U3.8 | length 44.7
  Top Layer w0.3: v1(30.6,30.6) 30.6,26.3 33,23.9 U1.36 ; v1(33.1,33) 34.2,34.1 56.282,34.1 58.182,36 60.05,36 60.49,35.56 U3.8
  Bottom Layer w0.3: v1(30.6,30.6) 30.7,30.6 v1(33.1,33)
uC_SPI2_NSS: U1.33 U3.10 | length 40.5
  Top Layer w0.3: U1.33 34.2,25.4 33.05,26.55 33.05,30.55 35.4,32.9 62.7,32.9 63.03,33.23 U3.10
uC_SPI2_SCK: U1.34 U3.7 | length 37.8
  Top Layer w0.3: U1.34 33.75,24.9 32.4,26.25 32.4,30.789 35.111,33.5 58.182,33.5 U3.7
uC_SWCLK: P1.9 U1.49 | length 43.7
  Top Layer w0.3: U1.49 38.5,17.8 v1(38.8,18.1)
  Bottom Layer w0.35: P1.9 8.2,30.06 8.2,28.5 11.1,25.6 33.02,25.6 37.82,20.8 39.1,20.8 39.83,20.07 39.83,19.03 38.9,18.1 v1(38.8,18.1)
uC_SWDIO: P1.7 U1.46 | length 38.8
  Top Layer w0.3: U1.46 38.1,18.9 v1(38.8,19.6)
  Bottom Layer w0.35: P1.7 10.82,24.9 32.6,24.9 37.9,19.6 v1(38.8,19.6)
uC_USB_DM: U1.44 U4.6 | length 33.5
  Top Layer w0.254: U4.6 13.15,10.8 13.65,10.3 27.5,10.3 28.3,11.1 v1(28.3,16.3)
  Top Layer w0.3: v1(33.7,19.9) U1.44
  Bottom Layer w0.3: v1(28.3,16.3) 31.9,19.9 v1(33.7,19.9)
uC_USB_DP: U1.45 U4.4 | length 33.4
  Top Layer w0.254: U4.4 10.5,9.8 11.4,8.9 12.555,8.9 13.374,9.719 27.719,9.719 29.3,11.3 v1(29.3,15.3)
  Top Layer w0.3: v1(33.7,18.4) 34.7,19.4 U1.45
  Bottom Layer w0.3: v1(29.3,15.3) 32.4,18.4 v1(33.7,18.4)
USB_DM: J1.2 U4.1 | length 9.2
  Top Layer w0.254: J1.2 7.314,12.25 7.441,12.25 7.441,14.559 7.949,14.559 7.949,12.115 8.228,11.836 8.3,11.764 8.3,11 8.5,10.8 U4.1
USB_DP: J1.3 U4.3 | length 6
  Top Layer w0.254: v1(7.3,9.2) 7.3,9.3 7.8,9.8 U4.3
  Top Layer w0.4: J1.3 6.9,11.6 v1(7.3,11.2)
  Bottom Layer w0.254: v1(7.3,9.2) 7.3,11 7.4,11.1 v1(7.3,11.2)
VBUS: C13.1 C23.2 J1.1 R9.1 U2.1 U4.5 | length 38
  Top Layer w0.254: U4.5 11.537,10.3 v1(12.037,9.8)
  Top Layer w0.3: v1(12,16) 12.037,16.038 13.338,16.038 14.15,16.85 U2.1
  Top Layer w0.4: J1.1 6.361,12.9 6.695,13.234 6.695,15.034 7.262,15.6 8.9,15.6 C23.2 ; C13.1 12.037,14.637 12.037,15.963 v1(12,16) ; v1(24.8,11.4) R9.1
  Top Layer w0.5: C23.2 C13.1
  Bottom Layer w0.254: v1(12,16) 12.037,15.963 v1(12.037,9.8)
  Bottom Layer w0.35: v1@12,16.3 v1@12.15,16.15 ; v1@12.037,15.963 14.4,13.6 21,13.6 23.2,11.4 v1(24.8,11.4)
VDDA: C11.2 C12.2 L1.2 U1.13 | length 10.9
  Top Layer w0.3: U1.13 49.8,23.9 50.8,24.9 50.8,26 52.1,27.3 C11.2 C12.2 L1.2
VSSA: C11.1 C12.1 L2.2 U1.12 | length 8.3
  Top Layer w0.3: U1.12@48.1,23.4 52.2,23.4 L2.2 C11.1 C12.1
VSYS: C15.1 U2.2 | length 3.3
  Top Layer w0.3: C15.1 14.6,15.1 U2.2
pads on no net: J1.4 OLED1.16 OLED1.17 OLED1.20 OLED1.21 OLED1.22 OLED1.23 OLED1.24 OLED1.25 P1.3 P1.5 P1.11 P1.13 P1.17 P1.19 U1.1 U1.2 U1.3 U1.4 U1.8 U1.9 U1.10 U1.11 U1.15 U1.22 U1.24 U1.25 U1.26 U1.27 U1.28 U1.42 U1.43 U1.50 U1.54 U1.55 U1.56 U1.57 U1.58 U1.59 U1.61 U1.62 U3.1 U3.2 U3.3

## Polygon pours and split planes (outlines as drawn)
GND on Top Layer "NONET_L-01_P-001" (solid, remove dead copper, pour order 0): 0,56 70,56 70,0 0,0
GND on Bottom Layer "NONET_L-01_P-001" (solid, remove dead copper, pour order 1): 0,56 70,56 70,0 0,0

## Keep-outs
Keep-Out Layer:
  lines w0.254: 65.8,49.5 65.8,33.4 70,33.4 70,0 0,0 0,56 36.1,56 36.1,53.6 48.6,53.6 48.6,56 70,56 70,49.5 65.8,49.5 ; 65.8,49.5 65.8,49.5

## Other copper
Top Layer:
  rectangle net GND: 13.1,18.4 17.1,19.8
Multi-Layer:
  pour cut-out: 62.2,56 70,56 70,34.5 62.2,34.5

## Silkscreen, mask and mechanical layers (free items; w line width, h text height)
Top Overlay:
  drawing of 3 lines, arcs and shapes, not listed
  text "Prokey Technologies" at 34.323,31.802 h1.52
  text "USB" at 6.94,6.919 h1.6
  text "-" at 18.73,3.187 h1.5
  text "+" at 10.322,3.159 h1.5
Bottom Overlay:
  drawing of 2 lines, arcs and shapes, not listed
  text "Prokey Technologies" at 35.846,36.062 h1.52
  text "Prokey.io" at 26.346,33.462 h1.52
  text "V1.0" at 68.846,8.154 h1.52
  text "License: GPL-3.0" at 62.292,6.354 h1.52
  text "github.com/prokey-io" at 62.546,3.762 h1.52
  text "This is an opensource evaluation board." at 63.246,0.962 h1.52

## Text inside footprints (layer, text, board x,y; h text height)
P1: Top Overlay "2" at 4.65,19.46 h1.5 r90; Top Overlay "1" at 7.19,19.96 h1.5 r90; Top Overlay "20" at 4.65,45.72 h1.5 r90; Top Overlay "19" at 7.19,45.72 h1.5 r90